# Altium PCB ats_relay.PcbDoc
Units mm, origin at the board's own origin, x right, y up, seen from the top; angles counter-clockwise.
Board outline 70.25 x 50.25 mm, 2 copper layers (Top Layer, Bottom Layer); 12 components, 10 nets, 30 pads, 0 vias.
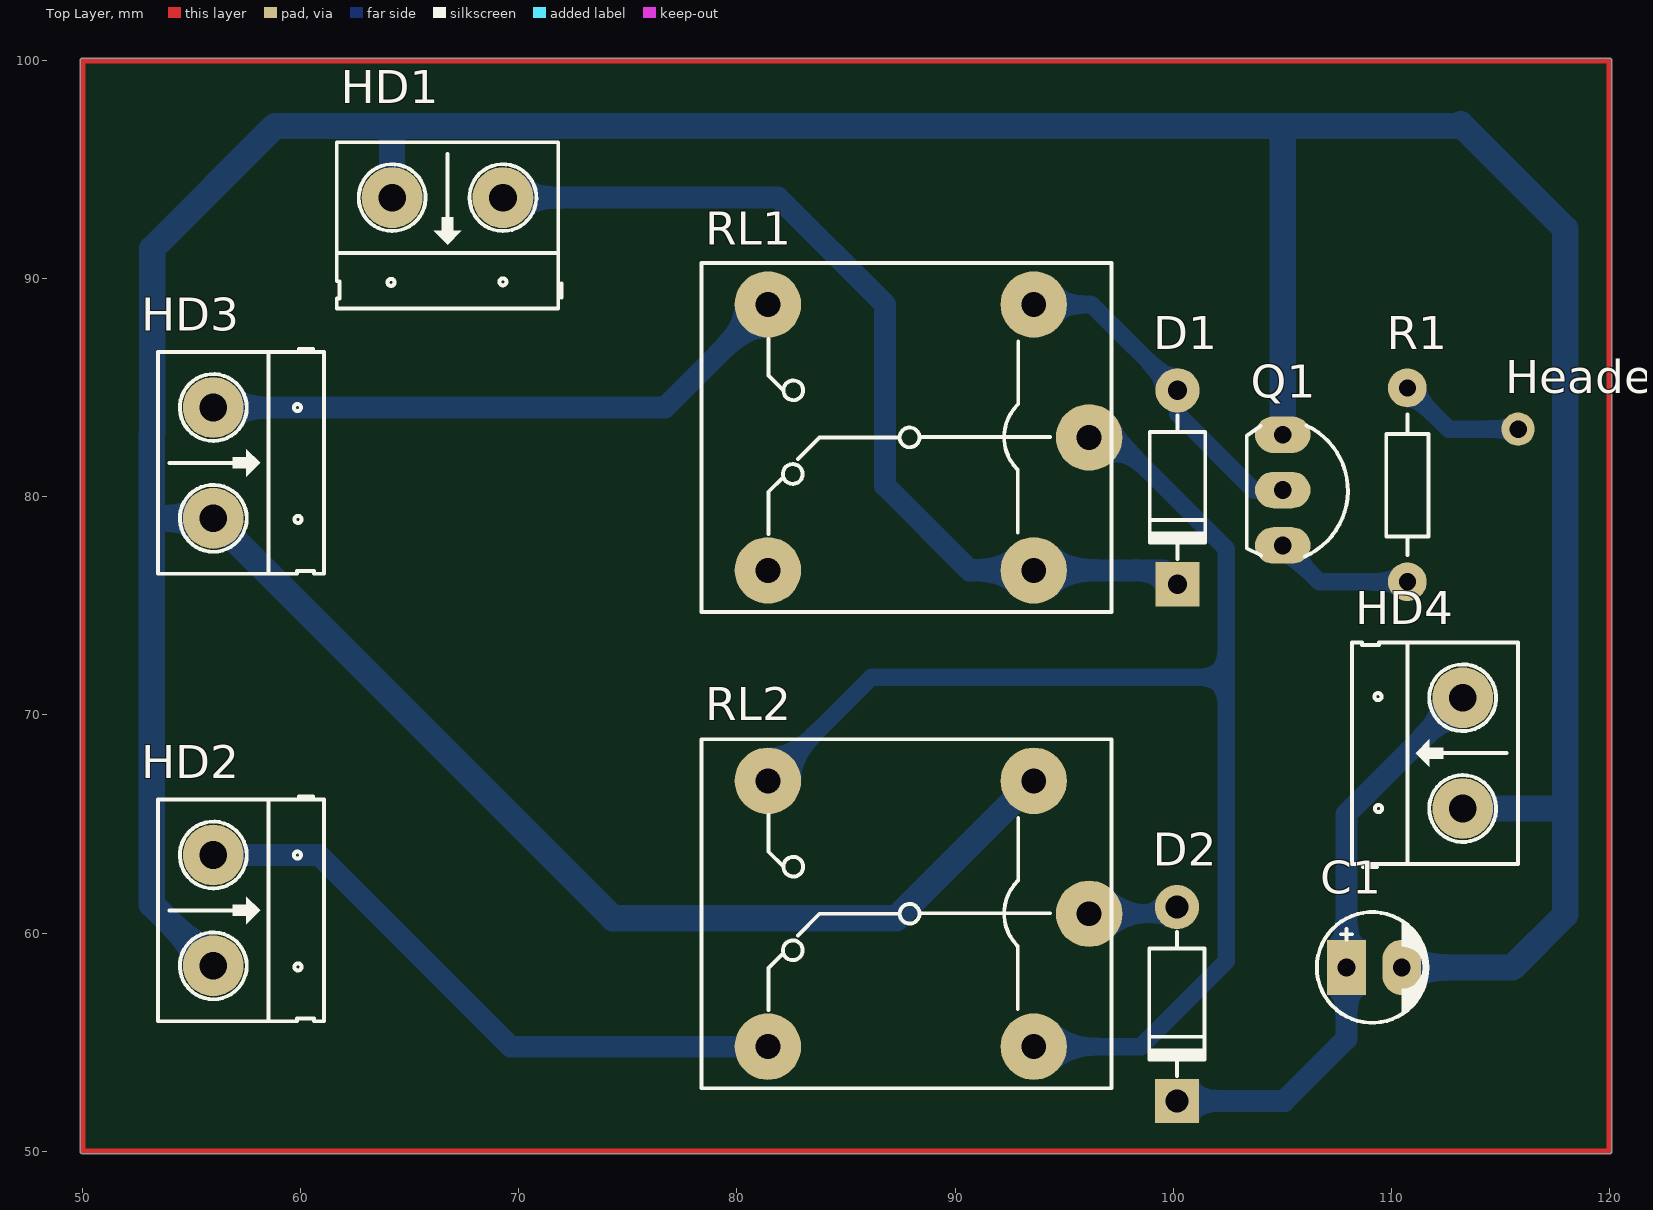
[diagram p0: Top Layer view]
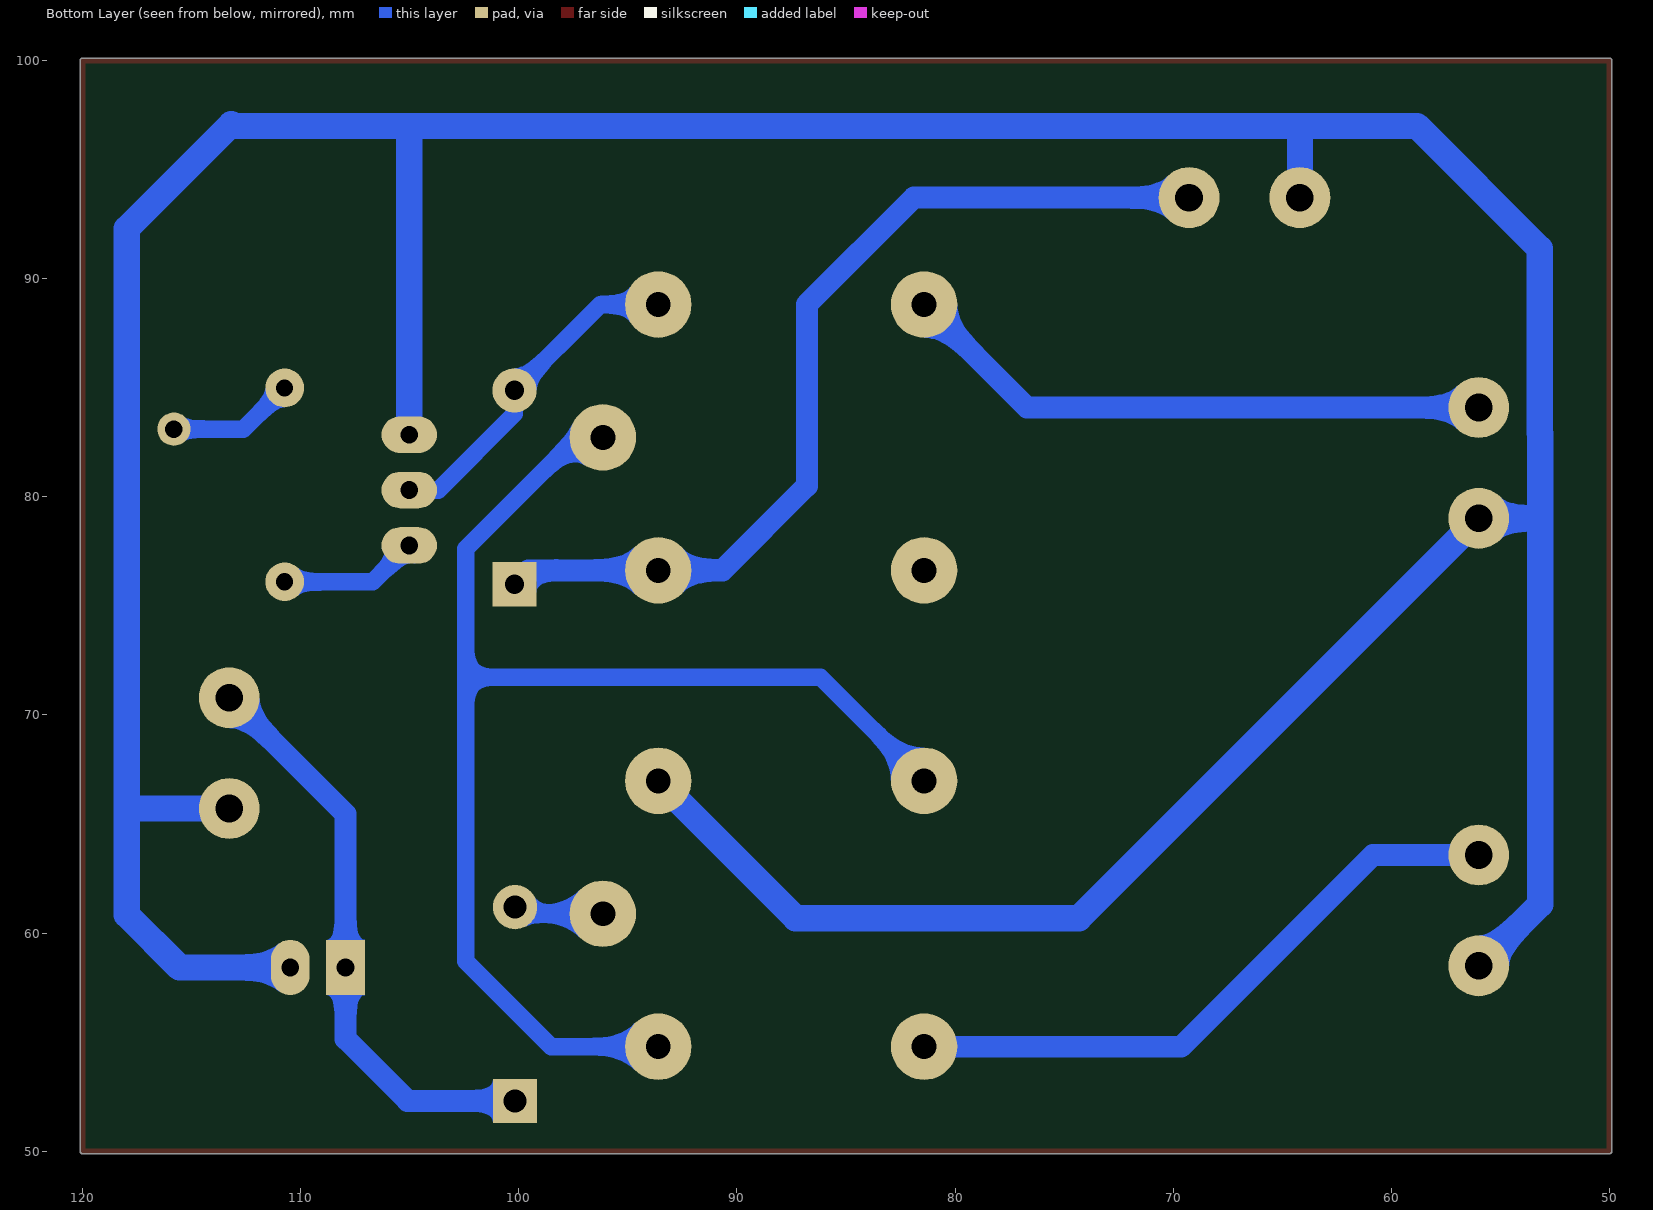
[diagram p1: Bottom Layer view, seen from below]
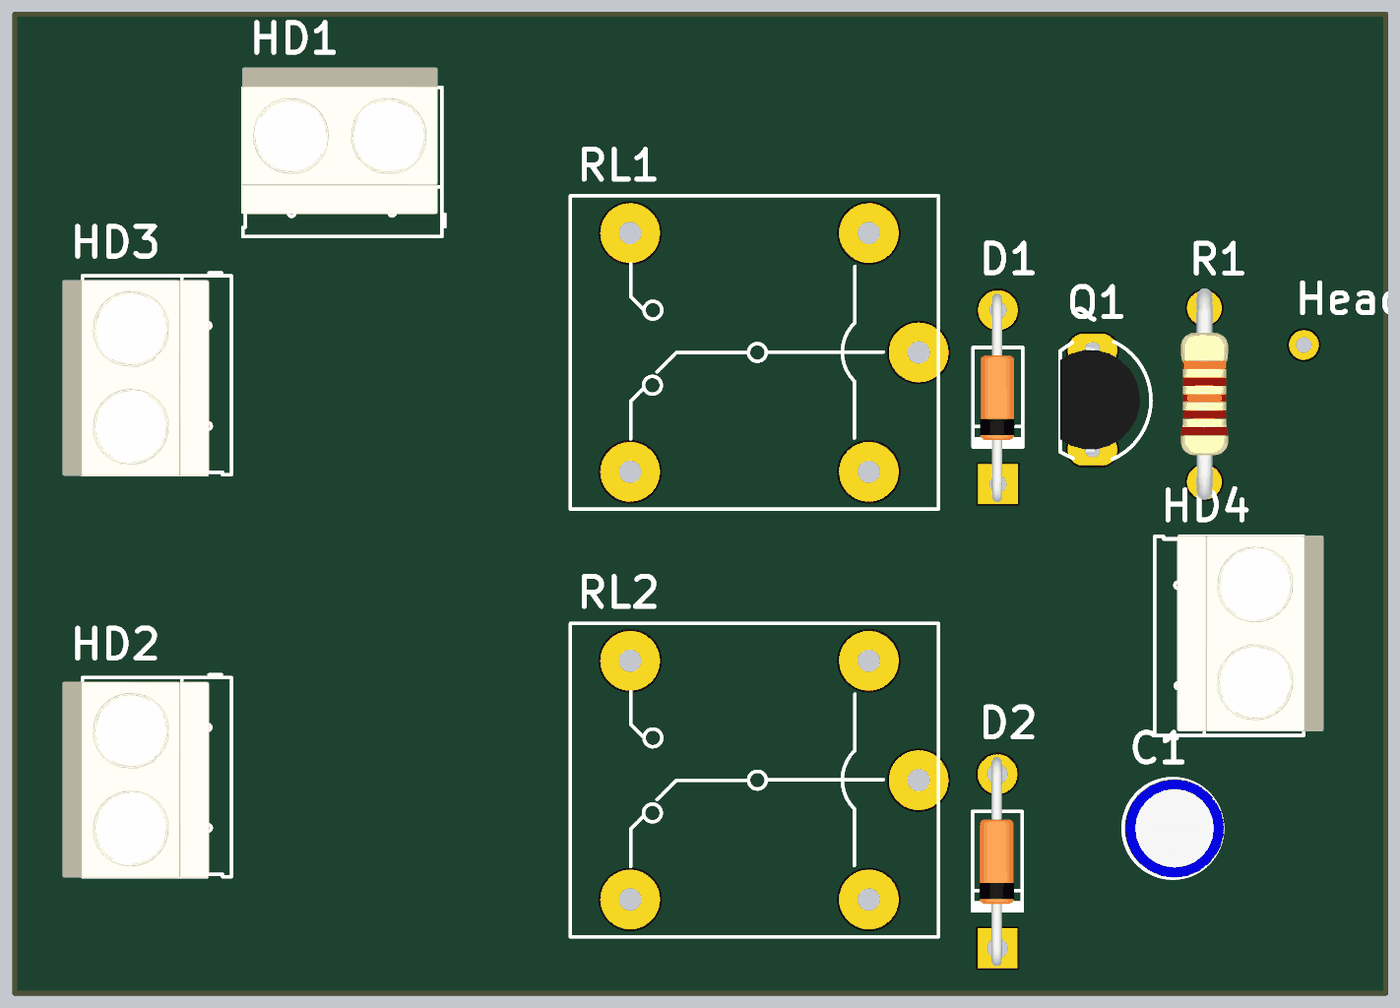
[diagram p2: 3D render of the assembled board from above, using the file's embedded part models]

## Layer stack, top to bottom
Top Solder: solder mask 0.0102, Solder Resist, Dk 3.5
Top Layer: signal copper 0.0356
Dielectric 1: dielectric 0.32, FR-4, Dk 4.8
Bottom Layer: signal copper 0.0356
Bottom Solder: solder mask 0.0102, Solder Resist, Dk 3.5

## Board outline
49.873,50 ccw(c50,50) 50.001,49.873 120,49.873 ccw(c120,50) 120.127,50 120.127,100 ccw(c120,100) 120,100.127 50,100.127 ccw(c50,100) 49.873,100

## Design rules (kind name [scope] priority, off if disabled: settings)
Clearance [All] p1: gap=0.8
PolygonConnect [All] p1: connectstyle=Relief reliefconductorwidth=0.254 reliefentries=4 polygonreliefangle="90 Angle" airgapwidth=0.254
RoutingLayers [All] p1: top layer_v5=FALSE bottom layer_v5=TRUE
RoutingVias [All] p1: holewidth=0.711 width=1.27 viastyle="Through Hole" minholewidth=0.711 minwidth=1.27 maxholewidth=0.711 maxwidth=1.27
SolderMaskExpansion [All] p1: expansion=0.102
Width 5V [InNet('5V')] p1: maxlimit=1 minlimit=1 preferedwidth=1
Width NET [InNetClass('NET CLASS')] p2: maxlimit=0.8 minlimit=0.8 preferedwidth=0.8
Width 12VPHU [InNet('12VPHU')] p3: maxlimit=1 minlimit=1 preferedwidth=1
Width GND [InNet('GND')] p4: maxlimit=1.2 minlimit=1.2 preferedwidth=1.2
Width 12V [InNet('12V')] p5: maxlimit=1 minlimit=1 preferedwidth=1
Width 12Vchinh [InNet('12VCHINH')] p6: maxlimit=1 minlimit=1 preferedwidth=1
29 further rules are at their usual default settings.

## Classes and differential pairs
net class "NET CLASS": NetD1_1 NetD2_1 NetHeader1_1 NetQ1_3 NetRL1_1

## Components (designator, comment, footprint, x,y, rotation, side; value= is the part's Value field where it differs from the comment)
C1 "2200uF" CP1/2 107.95,58.42 r0 top
D1 "1N4007" D1A#1 100.203,84.887 r90 top
D2 "1N4007" D1A#2 100.178,61.189 r90 top
HD1 "Header 2" HED2 69.266,93.726 r180 top
HD2 "Header 2" HED2 55.982,63.576 r270 top
HD3 "Header 2" HED2 55.982,84.099 r270 top
HD4 "Header 2" HED2 113.284,65.71 r90 top
Header1 "jum1" PCBComponent_1 115.824,83.109 r90 top
Q1 "C1815" QTO-92 105.029,80.315 r270 top
R1 "4k7" R1/4W 110.744,84.999 r270 top
RL1 "Relay 10A/5V" RL_SPDT_10A 96.152,82.728 r180 top
RL2 "Relay 10A/12V" RL_SPDT_10A 96.152,60.884 r180 top

## Footprints (in the part's own frame and the unit in brackets; to place one, negate y for a bottom-side part, rotate by r counter-clockwise, add the part's x,y. Pads: shape width x height; smd on the part's side, far side on the other; paste and mask are expansions set on the pad)
CP1/2 [mil] "Tu hoa < 22uF/16>50V"
  rect 70x100 hole 32: 1(0,0)
  oval 70x100 hole 32: 2(100,0)
  silkscreen extent -53,-100 147,100, body extent -49,-99 149,99, height 287
D1A#1 [mil] "Diode 1A, W 100mil, L 350mil"
  round 80 hole 35: 1(0,0)
  rect 80x80 hole 35: 2(-350,0)
  silkscreen extent -305,-50 -45,50, body extent -386,-33 34,36, height 84
D1A#2 [mil] "Diode 1A, W 100mil, L 350mil"
  round 80 hole 41.34: 1(0,0)
  rect 80x80 hole 41.34: 2(-350,0)
  silkscreen extent -305,-50 -45,50, body extent -386,-33 34,36, height 84
HED2 [mil] "Header 2, 2 pin, hight 300mil, Pin to Pin 200, Colour Green"
  round 110 hole 50: 1(0,0) 2(200,0)
  silkscreen extent -106,-100 300,200, body extent -92,-140 302,155, height 394
PCBComponent_1 [mil]
  round 60 hole 31.5: 1(0,0)
QTO-92 [mil] "TO-92"
  oval 66x100 hole 32: 1(-100,0) 2(0,0) 3(100,0)
  silkscreen extent -117,-65 120,118, body extent -109,-66 109,95, height 245
R1/4W [mil] "R 1/4W, 2 Pin, 350mil"
  round 70 hole 31: 1(0,0) 2(350,0)
  silkscreen extent 48,-38 302,38, body extent -40,-47 386,47, height 111
RL_SPDT_10A [mil] "Relay SPDT, 5 pin, 10A,W 650mil, L 800mil, H 800mil"
  round 120 hole 45: 1(0,0) 2(580,240) 3(580,-240) 4(100,-240) 5(100,240)
  silkscreen extent -40,-315 700,315

## Part data
C1: library part CP1, "Cap P  0,1uF < 22uF , 16 - 50V"
D1 D2: library part D1A, "Diode 1A"
HD1 HD2 HD3 HD4: library part Hed2, "Header 2 (Green)"
Q1: "NPN 600mW, ECB"
R1: library part R1/4W, "Resistor 1/4W"
RL1 RL2: library part "Relay 1", "Relay SPDT,10A - 12VDC 5 Pin"

## Nets (pads, with @x,y where several pads share a name; then routed paths per layer and width w, separated by ;. In a path a pad name is that pad's centre, name@x,y a point inside that pad or via, vN(x,y) a via of type N, cw(c..) or ccw(c..) an arc to the next point about the centre after c; other vN are vias at no path point)
5V: D1.2 HD1.1 RL1.5 | length 43.2
  Bottom Layer w1: HD1.1 81.89,93.726 86.792,88.824 86.792,80.505 90.665,76.632 RL1.5 99.568,76.632 D1.2
12V: C1.1 D2.2 HD4.2 | length 26.8
  Bottom Layer w1: D2.2 105.105,52.299 107.95,55.143 C1.1 107.95,65.456 HD4.2
12VCHINH: HD3.1 RL1.3 | length 27.4
  Bottom Layer w1: HD3.1 76.695,84.099 RL1.3
12VPHU: HD2.1 RL2.2 | length 29.1
  Bottom Layer w1: HD2.1 60.833,63.576 62.052,62.357 69.621,54.788 RL2.2
GND: C1.2 HD1.2 HD2.2 HD3.2 HD4.1 Q1.1 RL2.4 | length 215.6
  Bottom Layer w1.2: HD2.2 53.162,61.316 53.162,79.096 ; HD1.2 64.186,97.015 ; RL2.4 87.312,60.681 74.32,60.681 HD3.2 53.238,79.019 53.162,79.096 ; Q1.1 105.029,97.015 ; C1.2 115.57,58.42 117.986,60.836 117.986,92.301 113.195,97.091 113.119,97.015 105.029,97.015 ; HD4.1 117.564,65.71 ; 53.162,79.096 53.162,82.906 53.185,82.928 53.185,91.386 58.814,97.015 64.186,97.015 ; 64.186,97.015 105.029,97.015
NetD1_1: D1.1 Q1.2 RL1.4 | length 15.6
  Bottom Layer w0.8: RL1.4 96.266,88.824 D1.1 100.203,83.82 103.708,80.315 Q1.2
NetD2_1: D2.1 RL2.1 | length 4.2
  Bottom Layer w0.8: RL2.1 99.873,60.884 D2.1
NetHeader1_1: Header1.1 R1.1 | length 5.9
  Bottom Layer w0.8: R1.1 112.634,83.109 Header1.1
NetQ1_3: Q1.3 R1.2 | length 6.4
  Bottom Layer w0.8: Q1.3 106.695,76.109 R1.2
NetRL1_1: RL1.1 RL2.3 RL2.5 | length 59.7
  Bottom Layer w0.8: RL2.3 86.169,71.73 102.438,71.73 ; RL2.5@94.64,54.788 98.527,54.788 102.438,58.699 102.438,64.033 102.438,71.73 ; RL1.1 97.333,82.728 102.438,77.622 102.438,71.73
pads on no net: RL1.2
copper on no net: | length 240
  Top Layer w0.254: 50,50 120,50 120,100 50,100 50,50